# EAGLE board XT60 (EAGLE 9.6.2)
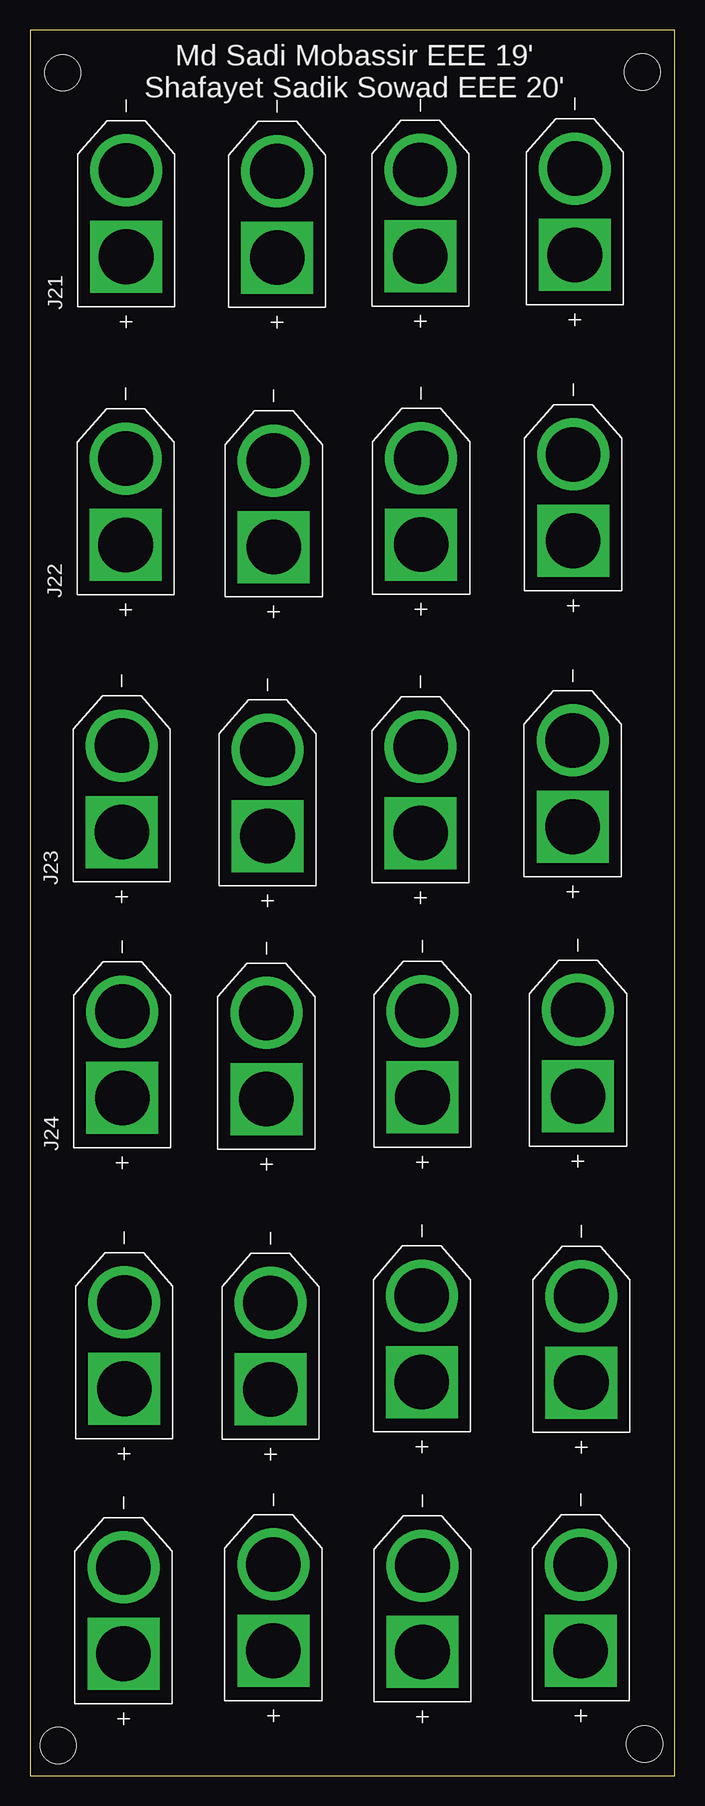
[diagram p0: board, top side]
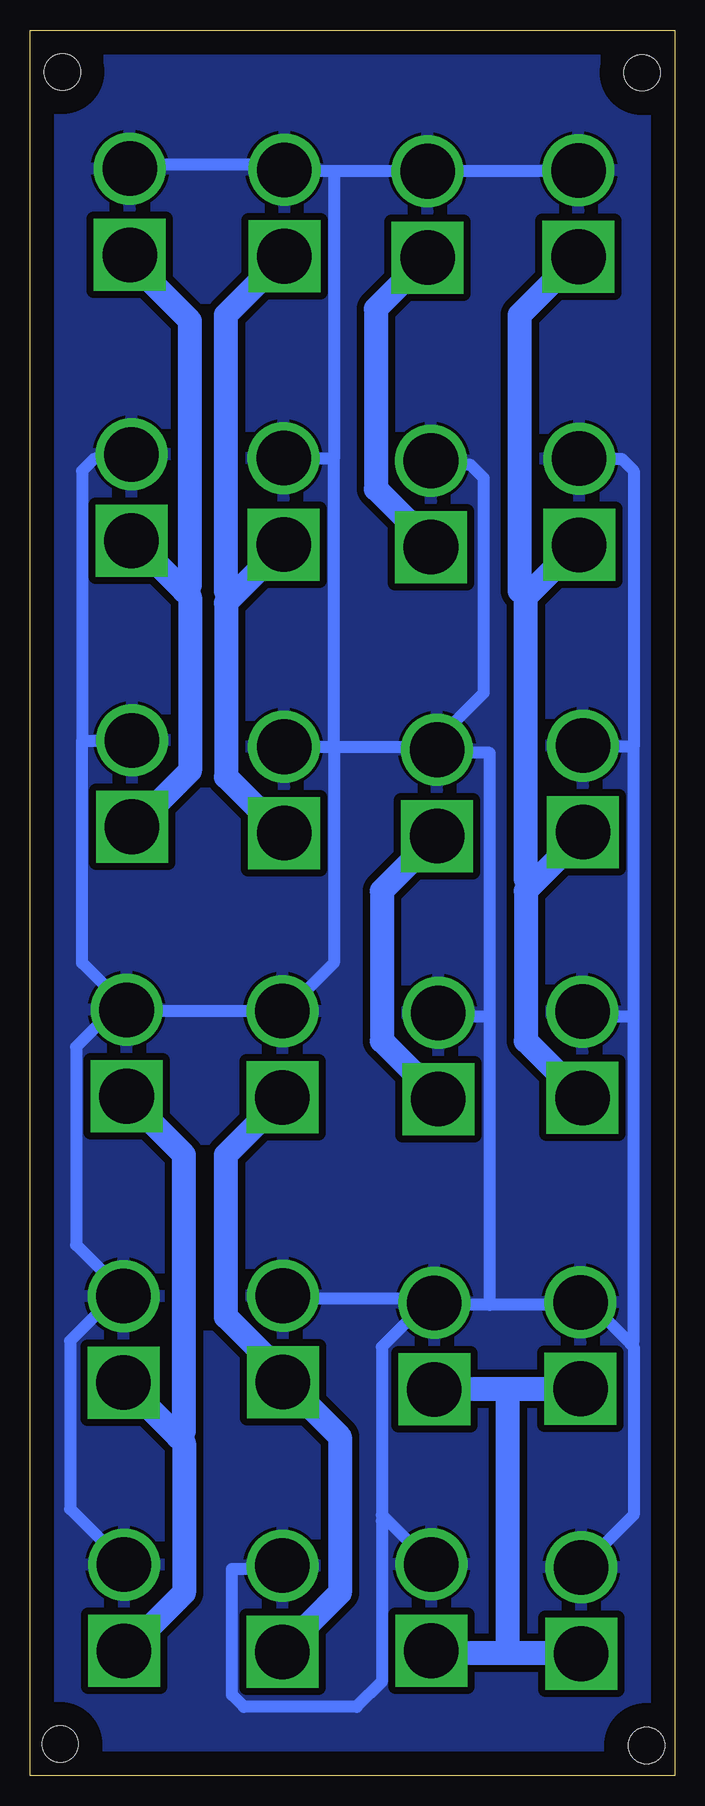
[diagram p1: board, bottom side, seen from below]

Size 53.77 x 145.47 mm. Coordinates in mm from the lower left corner, seen from the top.
Outline: 0,0 53.77,0 53.77,145.47 0,145.47 0,0
Copper layers (1*16): Top 0.035mm / dielectric 1.5mm / Bottom 0.035mm
Design rules "default *": minimum track width 1mm, minimum drill 0.65mm, track to track 0.6mm, track to pad 0.6mm, pad to pad 0.6mm, via to via 0.6mm, smd to smd 6mil, copper to edge 2mm, drill to drill 20mil, minimum pad ring 10mil, minimum via ring 8mil, stop-mask expansion 4mil, vias tented up to drill 0mil, thermal gap 10mil
Net classes: 0 default: width 1 mm, drill 0.762 mm, clearance 0.3 mm; 1 power: width 2 mm, drill 0.762 mm, clearance 0.3 mm
Holes 3 mm at 51.24,2.63 2.36,2.51 2.73,141.89 51.06,141.97

## Footprints (pad centres in the part's own frame; a part is rotated, then mirrored left to right if it is on the bottom)
AMASS_XT60-M = drill 4.55 pad 6: N 3.6,0 | drill 4.55 pad 6 square: P -3.6,0

## Placement (x,y rotation side)
J1  XT60-M  [AMASS_XT60-M]  45.3,106.5 90 top
J2  XT60-M  [AMASS_XT60-M]  45.44,130.32 90 top
J3  XT60-M  [AMASS_XT60-M]  45.25,82.67 90 top
J4  XT60-M  [AMASS_XT60-M]  45.71,60.21 90 top
J5  XT60-M  [AMASS_XT60-M]  45.93,13.99 90 top
J6  XT60-M  [AMASS_XT60-M]  45.98,36.35 90 top
J7  XT60-M  [AMASS_XT60-M]  32.62,106.19 90 top
J8  XT60-M  [AMASS_XT60-M]  32.56,130.21 90 top
J9  XT60-M  [AMASS_XT60-M]  32.57,82.14 90 top
J10  XT60-M  [AMASS_XT60-M]  32.73,60.11 90 top
J11  XT60-M  [AMASS_XT60-M]  32.68,36.39 90 top
J12  XT60-M  [AMASS_XT60-M]  32.73,13.9 90 top
J13  XT60-M  [AMASS_XT60-M]  20.61,130.09 90 top
J14  XT60-M  [AMASS_XT60-M]  20.33,105.97 90 top
J15  XT60-M  [AMASS_XT60-M]  19.81,81.89 90 top
J16  XT60-M  [AMASS_XT60-M]  19.71,59.97 90 top
J17  XT60-M  [AMASS_XT60-M]  20.05,35.79 90 top
J18  XT60-M  [AMASS_XT60-M]  20.3,14 90 top
J19  XT60-M  [AMASS_XT60-M]  7.86,35.83 90 top
J20  XT60-M  [AMASS_XT60-M]  7.8,13.76 90 top
J21  XT60-M  [AMASS_XT60-M]  8.02,130.17 90 top
J22  XT60-M  [AMASS_XT60-M]  7.98,106.15 90 top
J23  XT60-M  [AMASS_XT60-M]  7.65,82.23 90 top
J24  XT60-M  [AMASS_XT60-M]  7.7,60.07 90 top

## Library data of the parts
J1-J24 = XT60-M; AVAILABILITY: Not in stock; DESCRIPTION: Plug; DC supply; XT60; male; PIN: 2; for cable; soldered; 30A; 500V; MF: AMASS; MP: XT60-M; PACKAGE: Package; PRICE: None

## Nets
A [power]: J1.P J2.P J3.P
B [power]: J4.P J5.P J6.P
C [power]: J7.P J8.P J9.P
D [power]: J10.P J11.P J12.P
E [power]: J13.P J14.P
F [power]: J15.P J16.P
G [power]: J17.P J18.P J19.P J20.P
GND: J1.N J2.N J3.N J4.N J5.N J6.N J7.N J8.N J9.N J10.N J11.N J12.N J13.N J14.N J15.N J16.N J17.N J18.N J19.N J20.N J21.N J22.N J23.N J24.N
H [power]: J21.P J22.P J23.P J24.P

## Tracks (layer width: path | path; a pad name or v marks a point on that pad's centre or on a via)
A
  Bottom 2: 40.93,98.72 44.93,102.72 J1.P | 40.93,98.72 40.43,98.22 40.43,83.72 44.93,79.22 J3.P | J2.P 45.43,126.22 40.43,121.22 40.43,99.22 40.93,98.72
B
  Bottom 2: 41.43,28.22 45.93,32.72 J6.P | 41.43,28.22 40.93,27.72 40.93,15.22 45.43,10.72 J5.P | J4.P 45.43,56.22 40.93,51.72 40.93,28.72 41.43,28.22
C
  Bottom 2: 36.93,98.22 32.93,102.22 J7.P | 36.93,98.22 37.43,97.72 37.43,83.22 32.93,78.72 J9.P | J8.P 32.93,126.22 37.43,121.72 37.43,98.72 36.93,98.22
D
  Bottom 2: J12.P 32.43,10.72 27.93,15.22 27.93,28.22 32.43,32.72 J11.P 32.93,33.72 37.43,38.22 37.43,51.72 32.93,56.22 J10.P
E
  Bottom 2: J14.P 20.43,102.72 24.93,107.22 24.93,122.22 20.93,126.22 J13.P
F
  Bottom 2: J16.P 19.93,56.72 24.43,61.22 24.43,73.72 19.93,78.22 J15.P
G
  Bottom 2: 13.93,32.22 19.93,32.22 J17.P | 13.93,32.22 7.93,32.22 J19.P | 13.93,10.22 19.93,10.22 J18.P | 13.93,10.22 7.93,10.22 J20.P | 13.93,10.22 13.93,32.22
GND
  Bottom 1: J5.N 45.93,17.72 50.43,22.22 50.43,36.22 46.43,40.22 J6.N 46.43,40.72 49.93,44.22 49.93,60.72 46.43,64.22 J4.N | J4.N 45.43,63.72 32.93,63.72 J10.N 32.43,63.72 28.43,67.72 28.43,85.72 | 49.43,86.22 45.43,86.22 J3.N | 49.43,86.22 49.43,67.72 45.93,64.22 J4.N | J1.N 45.43,109.72 48.43,109.72 49.43,108.72 49.43,86.22 | 28.43,85.72 32.43,85.72 J9.N | 28.43,85.72 19.93,85.72 J15.N | J14.N 19.93,109.22 17.03,109.22 15.93,108.12 15.93,90.22 19.93,86.22 J15.N | 28.43,109.72 32.43,109.72 J7.N | 28.43,85.72 28.43,109.72 | 28.43,133.72 32.43,133.72 J8.N 32.93,134.22 45.43,134.22 J2.N | 28.43,133.72 20.93,133.72 J13.N 20.43,133.72 8.43,133.72 J21.N | 28.43,133.72 28.43,109.72 | J20.N 3.43,21.72 3.43,35.72 3.68,35.97 | 3.68,35.97 7.43,39.72 J19.N 7.93,39.22 15.43,39.22 | 15.43,39.22 19.93,39.22 J17.N | 15.43,63.22 19.43,63.22 J16.N | 15.43,39.22 15.43,63.22 | 24.18,21.47 24.43,21.72 24.43,35.72 20.43,39.72 J17.N | 24.18,21.47 20.43,17.72 J18.N | J11.N 32.43,39.72 20.93,39.72 J17.N | J12.N 32.93,17.22 36.93,17.22 36.93,6.72 35.93,5.72 26.53,5.72 24.43,7.82 24.43,21.22 24.18,21.47 | 3.43,63.22 7.43,63.22 J24.N | 3.43,63.22 3.43,36.22 3.68,35.97 | 3.43,85.72 7.43,85.72 J23.N | 3.43,63.22 3.43,85.72 | 3.43,85.72 3.43,108.72 4.43,109.72 7.93,109.72 J22.N | 15.43,63.22 15.43,85.22 19.43,85.22 J15.N
  pour Bottom: -0.07,145.72 -0.07,-0.28 53.93,-0.28 53.93,145.72
H
  Bottom 2: 11.93,74.22 7.93,78.22 J23.P | 11.93,74.22 12.43,73.72 12.43,61.22 7.93,56.72 J24.P | 12.43,98.22 8.43,102.22 J22.P | 12.43,98.22 12.43,74.72 11.93,74.22 | J21.P 8.43,126.22 12.93,121.72 12.93,98.72 12.43,98.22

## Text on the board
tSilk: Md Sadi Mobassir EEE 19' / Shafayet Sadik Sowad EEE 20'